# Altium PCB Lab1_Konovalov_USB_RS485.PcbDoc
Units mm, origin at the board's own origin, x right, y up, seen from the top; angles counter-clockwise.
Board outline 47.5 x 32.5 mm, 4 copper layers (Top Layer, Signal Layer 1, Signal Layer 2, Bottom Layer), stack 1.522 mm thick; 17 components, 16 nets, 91 pads, 187 vias.
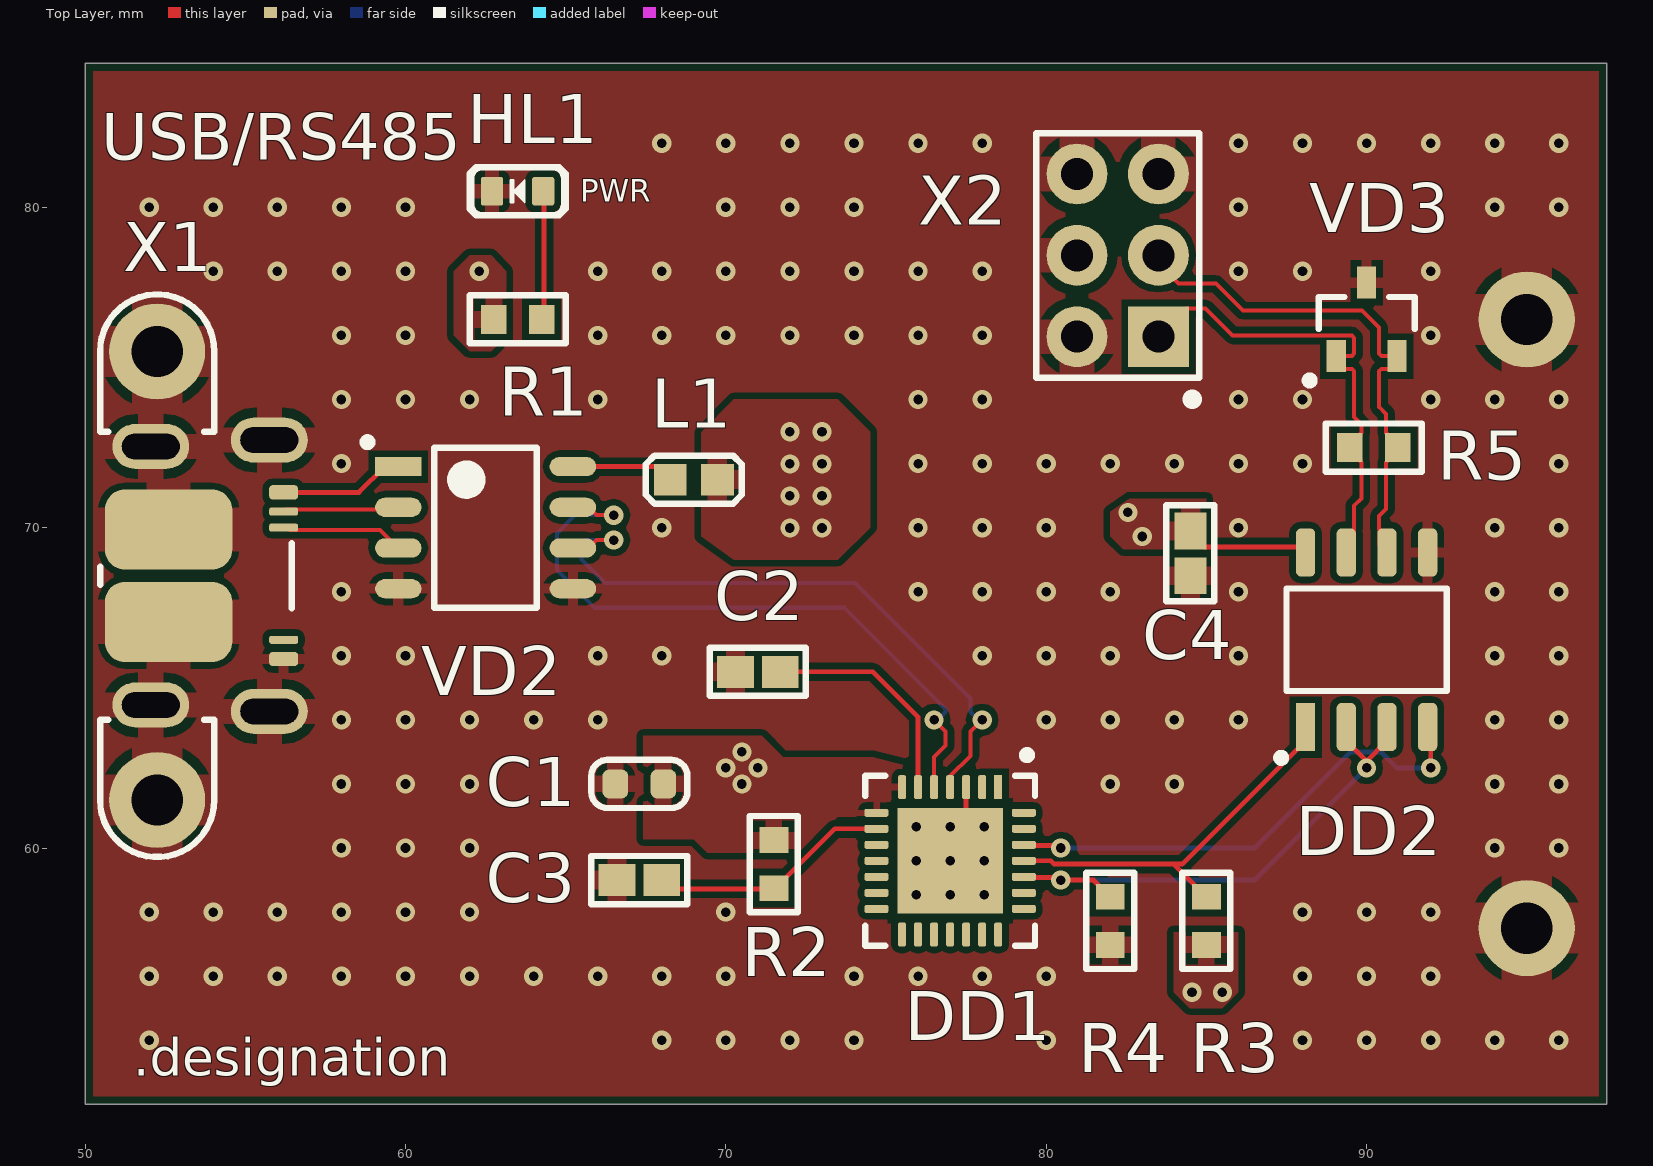
[diagram p0: Top Layer view]
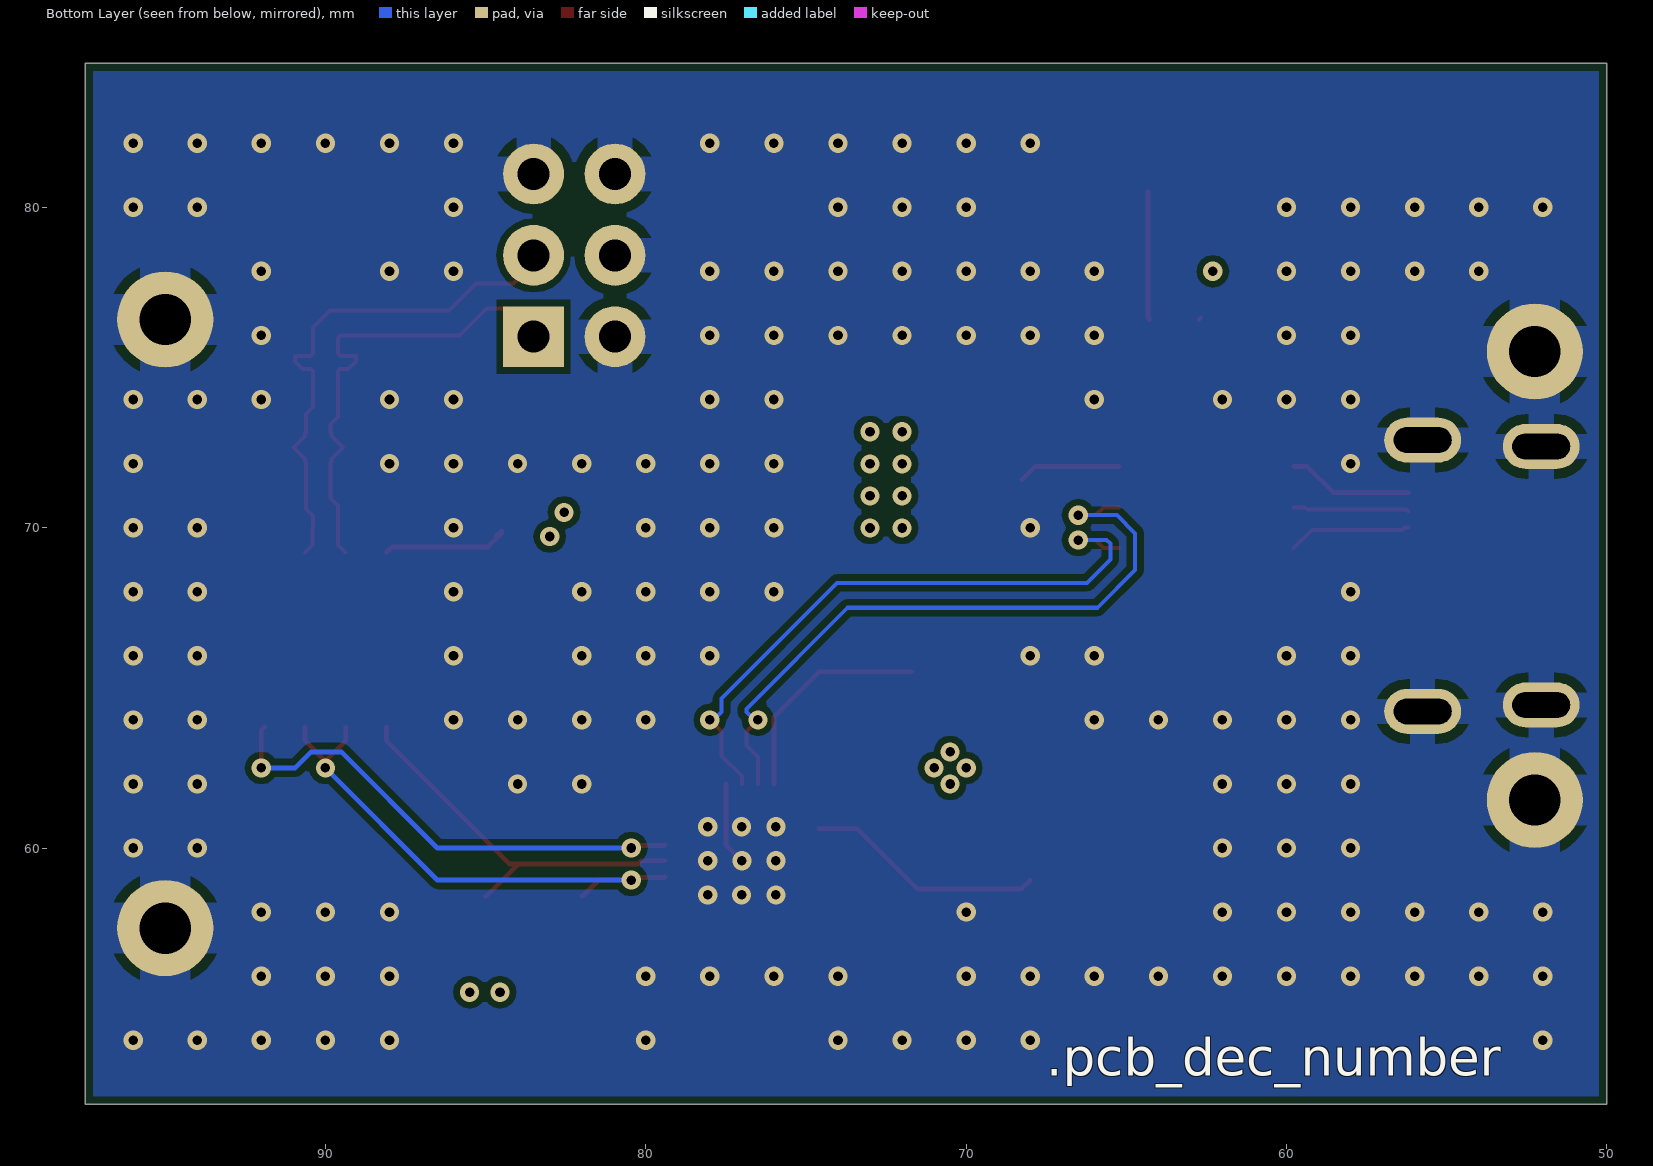
[diagram p1: Bottom Layer view, seen from below]
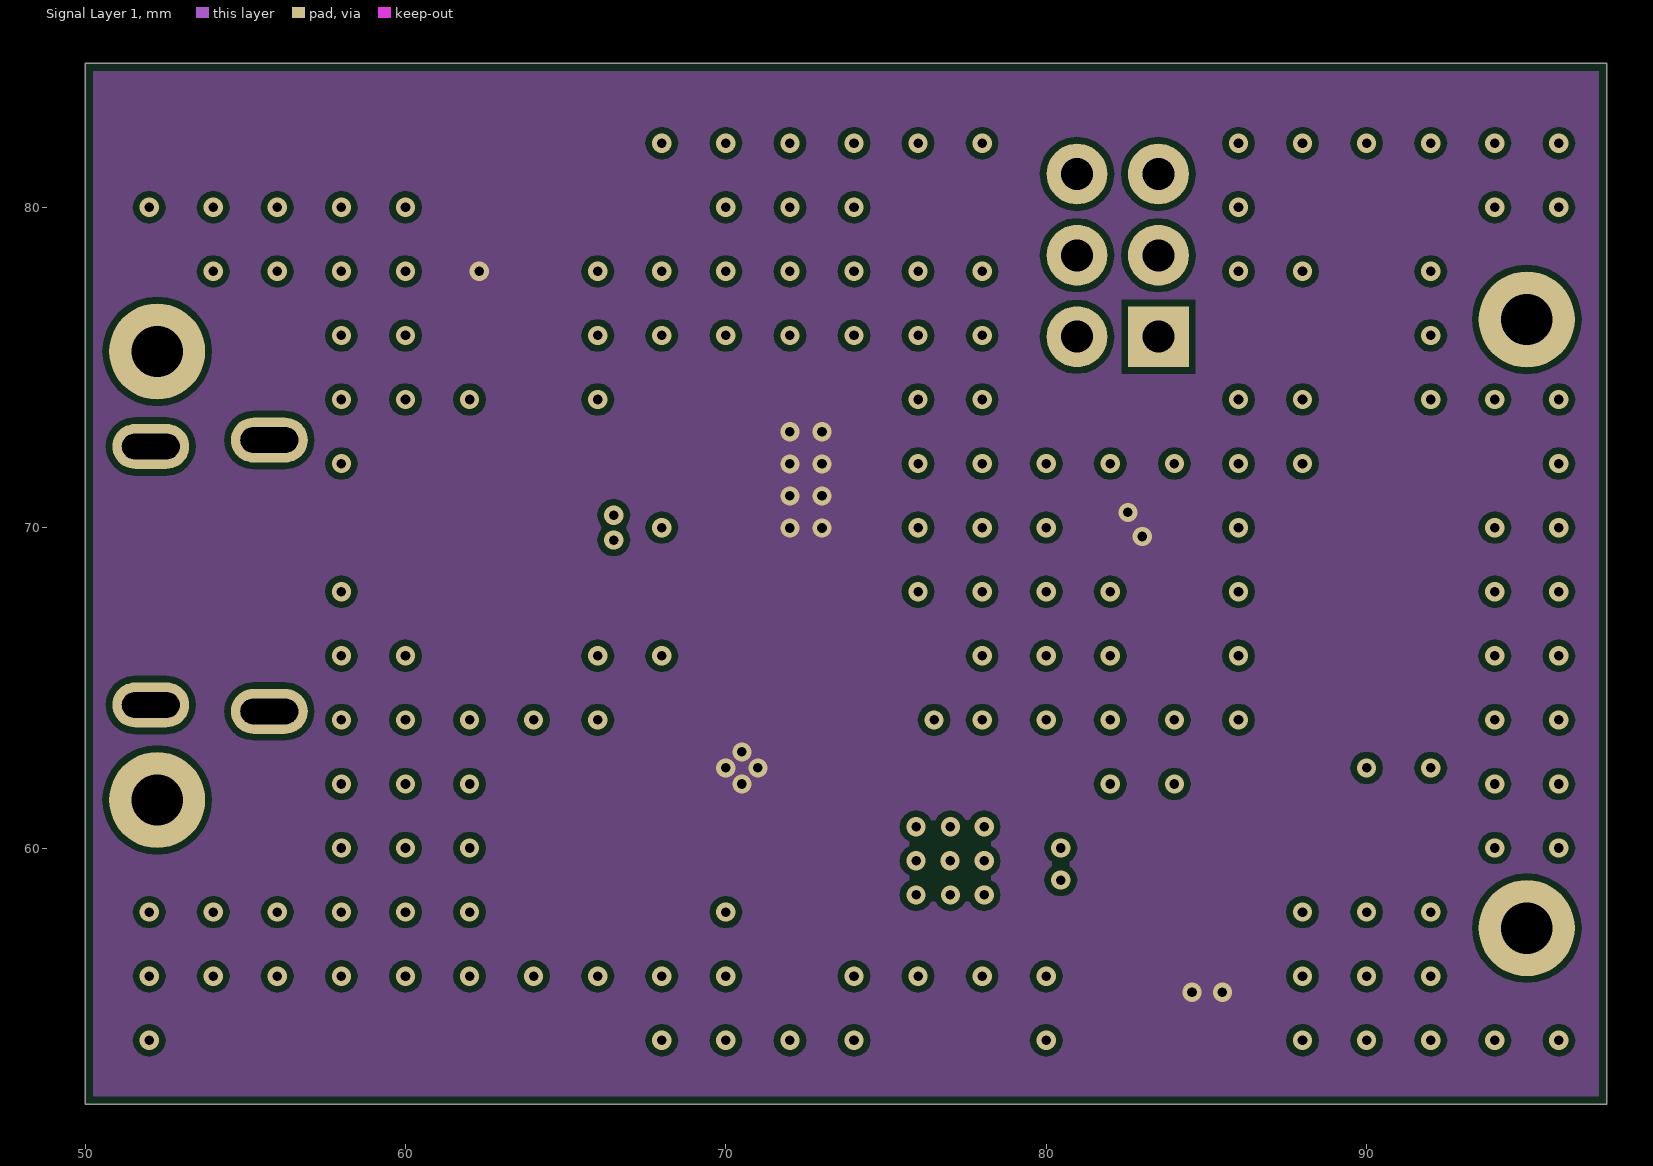
[diagram p2: Signal Layer 1]
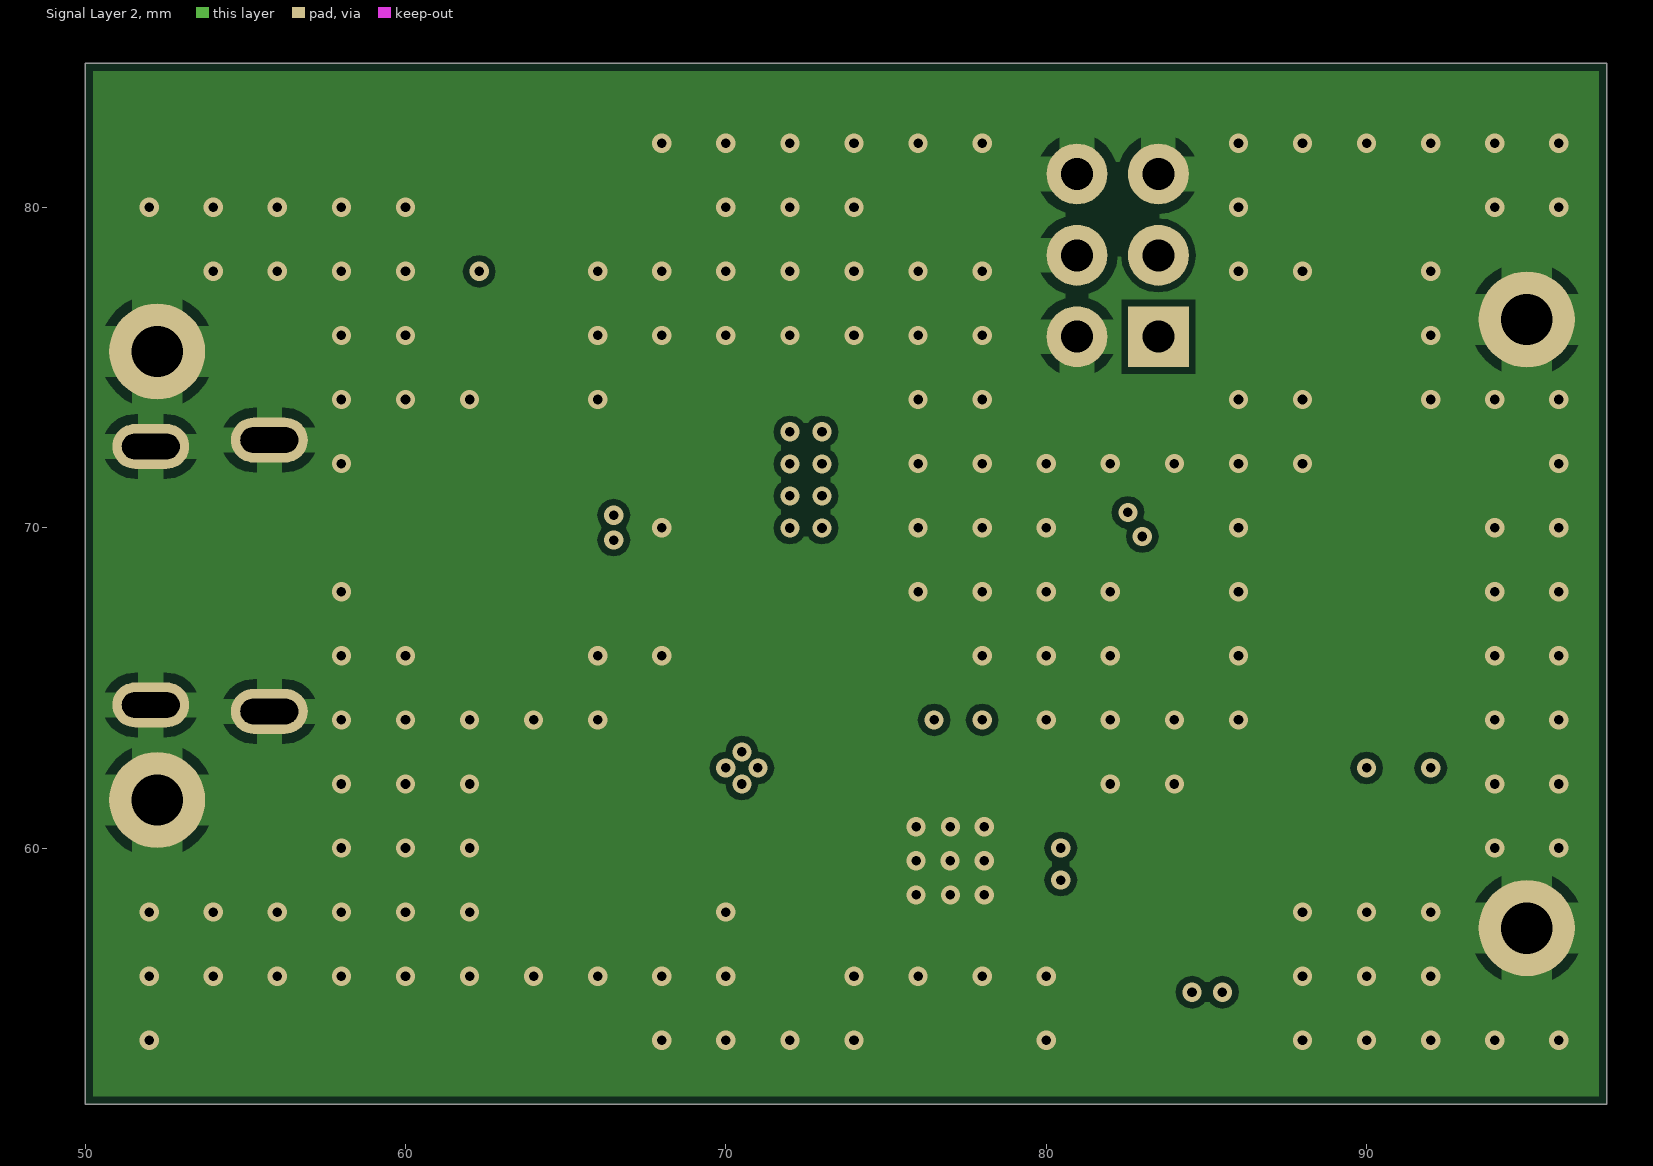
[diagram p3: Signal Layer 2]

## Layer stack, top to bottom
Top Solder: solder mask 0.0102, Solder Resist, Dk 3.5
Top Layer: signal copper 0.018
Prepreg 1: prepreg 0.125, FR4 HiTg170, Dk 5.07
Signal Layer 1: signal copper 0.018
Core 1: core 1.2, FR4, Dk 4.6
Signal Layer 2: signal copper 0.018
Prepreg 2: prepreg 0.125, FR4 HiTg170, Dk 5.07
Bottom Layer: signal copper 0.018
Bottom Solder: solder mask 0.0102, Solder Resist, Dk 3.5

## Board outline
50,52 50,84.5 97.5,84.5 97.5,52

## Design rules (kind name [scope] priority, off if disabled: settings)
AcuteAngle min_acute_angle [OnCopper] p1: minimum=3.50000000000000E+0001 checktracksonly=FALSE // Минимальный угол между примитивами топологии
BoardOutlineClearance board_outline_clearance_std [NOT (OnLayer('Bottom Overlay') OR OnLayer('Top Overlay'))] p1: gap=0.25 ignorepadtopadclearanceinfootprint=FALSE except(0: Arc-SplitContinuation Track-SplitContinuation SMDPad-SplitContinuation THPad-SplitContinuation Via-SplitContinuation Fill-SplitContinuation Poly-SplitContinuation Region-SplitContinuation Text-SplitContinuation) // Отступ элементов топологии от края фрезеруемой печатной платы
Clearance "Stitching GND" [IsStitchingVia and InNet('GND') vs (IsVia and (Not IsStitchingVia)) Or IsPad] p1: gap=0.127 ignorepadtopadclearanceinfootprint=FALSE
Clearance clearance_outer_18um_std [OnTopLayer OR OnBottomLayer] p2: gap=0.125 ignorepadtopadclearanceinfootprint=TRUE except(0.2: Arc-Fill Arc-Poly Track-Fill Track-Poly SMDPad-SMDPad SMDPad-Fill SMDPad-Poly THPad-Fill THPad-Poly Via-Fill Via-Poly Fill-Fill Fill-Poly Poly-Poly Poly-Region Poly-Text; 0.25: Arc-Hole Track-Hole SMDPad-Hole THPad-Hole Via-Hole Fill-Hole Poly-Hole Region-Hole Text-Hole) // Зазоры на внешних слоях
Clearance clearance_inner_18um_std [NOT (OnTopLayer Or OnBottomLayer)] p3: gap=0.125 ignorepadtopadclearanceinfootprint=FALSE except(0.2: Arc-Fill Arc-Poly Track-Fill Track-Poly SMDPad-SMDPad SMDPad-Fill SMDPad-Poly THPad-Fill THPad-Poly Via-Fill Via-Poly Fill-Fill Fill-Poly Poly-Poly Poly-Region Poly-Text; 0.25: Arc-Hole Track-Hole SMDPad-Hole THPad-Hole Via-Hole Fill-Hole Poly-Hole Region-Hole Text-Hole) // Зазоры на внутренних слоях
ComponentClearance [All] p1: gap=0 collisioncheckmode=3 verticalgap=0 showdistances=FALSE
DiffPairsRouting "Schematic Differential Pairs Routing_5" [InNet('RS485_P')] p1: maxlimit=0.65 minlimit=0.254 mostfreqgap=0.65 toplayer_mingap=0.65 toplayer_minwidth=0.125 toplayer_maxwidth=0.125 toplayer_prefwidth=0.125 bottomlayer_mingap=0.65 bottomlayer_minwidth=0.125 bottomlayer_maxwidth=0.125 bottomlayer_prefwidth=0.125 impedanceprofiledriven=TRUE impedanceprofileid={A63519B1-61F6-4221-AEF2-28902BD0E68D} impedanceprofilevalue=120.000000 maxuncoupledlength=12.7
DiffPairsRouting "Schematic Differential Pairs Routing_4" [InNet('D_IN_P')] p2: maxlimit=0.65 minlimit=0.254 mostfreqgap=0.65 toplayer_mingap=0.65 toplayer_minwidth=0.125 toplayer_maxwidth=0.125 toplayer_prefwidth=0.125 bottomlayer_mingap=0.65 bottomlayer_minwidth=0.125 bottomlayer_maxwidth=0.125 bottomlayer_prefwidth=0.125 impedanceprofiledriven=TRUE impedanceprofileid={A63519B1-61F6-4221-AEF2-28902BD0E68D} impedanceprofilevalue=120.000000 maxuncoupledlength=12.7
DiffPairsRouting "Schematic Differential Pairs Routing_3" [InNet('D_IN_N')] p3: maxlimit=0.65 minlimit=0.254 mostfreqgap=0.65 toplayer_mingap=0.65 toplayer_minwidth=0.125 toplayer_maxwidth=0.125 toplayer_prefwidth=0.125 bottomlayer_mingap=0.65 bottomlayer_minwidth=0.125 bottomlayer_maxwidth=0.125 bottomlayer_prefwidth=0.125 impedanceprofiledriven=TRUE impedanceprofileid={A63519B1-61F6-4221-AEF2-28902BD0E68D} impedanceprofilevalue=120.000000 maxuncoupledlength=12.7
DiffPairsRouting "Schematic Differential Pairs Routing_2" [InNet('USB_D_IN_N')] p4: maxlimit=0.65 minlimit=0.254 mostfreqgap=0.65 toplayer_mingap=0.65 toplayer_minwidth=0.125 toplayer_maxwidth=0.125 toplayer_prefwidth=0.125 bottomlayer_mingap=0.65 bottomlayer_minwidth=0.125 bottomlayer_maxwidth=0.125 bottomlayer_prefwidth=0.125 impedanceprofiledriven=TRUE impedanceprofileid={A63519B1-61F6-4221-AEF2-28902BD0E68D} impedanceprofilevalue=120.000000 maxuncoupledlength=12.7
DiffPairsRouting "Schematic Differential Pairs Routing_1" [InNet('USB_D_IN_P')] p5: maxlimit=0.65 minlimit=0.254 mostfreqgap=0.65 toplayer_mingap=0.65 toplayer_minwidth=0.125 toplayer_maxwidth=0.125 toplayer_prefwidth=0.125 bottomlayer_mingap=0.65 bottomlayer_minwidth=0.125 bottomlayer_maxwidth=0.125 bottomlayer_prefwidth=0.125 impedanceprofiledriven=TRUE impedanceprofileid={A63519B1-61F6-4221-AEF2-28902BD0E68D} impedanceprofilevalue=120.000000 maxuncoupledlength=12.7
DiffPairsRouting "Schematic Differential Pairs Routing" [InNet('RS485_N')] p6: maxlimit=0.65 minlimit=0.254 mostfreqgap=0.65 toplayer_mingap=0.65 toplayer_minwidth=0.125 toplayer_maxwidth=0.125 toplayer_prefwidth=0.125 bottomlayer_mingap=0.65 bottomlayer_minwidth=0.125 bottomlayer_maxwidth=0.125 bottomlayer_prefwidth=0.125 impedanceprofiledriven=TRUE impedanceprofileid={A63519B1-61F6-4221-AEF2-28902BD0E68D} impedanceprofilevalue=120.000000 maxuncoupledlength=12.7
DiffPairsRouting diff_pairs_routing [All] p7: maxlimit=0.254 minlimit=0.127 mostfreqgap=0.254 toplayer_maxgap=0.127 toplayer_prefgap=0.127 toplayer_minwidth=0.143 toplayer_maxwidth=0.143 toplayer_prefwidth=0.143 midlayer1_minwidth=0.381 midlayer1_maxwidth=0.381 midlayer1_prefwidth=0.381 midlayer2_minwidth=0.381 midlayer2_maxwidth=0.381 midlayer2_prefwidth=0.381 bottomlayer_maxgap=0.127 bottomlayer_prefgap=0.127 bottomlayer_minwidth=0.143 bottomlayer_maxwidth=0.143 bottomlayer_prefwidth=0.143 impedanceprofiledriven=TRUE impedanceprofileid={FD46899E-B5A2-4EF5-A302-5D2DB6A51F35} maxuncoupledlength=12.7 // Правила трассировки дифференциальных пар
HoleSize min_hole_size_std [IsPad] p1: absolutevalues=TRUE maxlimit=5.9 minlimit=0.6 maxpercent=80.000 minpercent=20.000 // Диаметр межслойного переходного отверстия
HoleSize min_hole_size_via_std [IsVia] p2: absolutevalues=TRUE maxlimit=5.9 minlimit=0.3 maxpercent=80.000 minpercent=20.000 // Минимальный диаметр монтажного отверстия
HoleToHoleClearance hole_to_hole_clearance_std [All] p1: gap=0.2 allowstackedmicrovias=FALSE // Минимальное расстояние между краями двух отверстий
MinimumAnnularRing min_via_ar_std [All] p1: minimumring=0.15 // Поясок площадки переходного отверстия (Annular ring VIA)
MinimumAnnularRing min_pad_ar_std [All] p2: minimumring=0.2 // Поясок монтажной контактной площадки (Annular ring PAD)
MinimumSolderMaskSliver min_solder_mask_bridge_std [All] p1: minsoldermaskwidth=0.15 // Мнимальная ширина масочного мостика
PlaneClearance plane_clearance_18um_std [All] p1: clearance=0.2 // Отступ полигона (для слоя plane) от элементов топологии
PlaneConnect [All] p1: planeconnectstyle=Relief reliefexpansion=0.5 reliefentries=4 reliefconductorwidth=0.2 reliefairgap=0.2
PolygonConnect poly_connect_to_pad<=0.3 [(AsMM(PadXSize_AllLayers)<=0.301) or (AsMM(PadYSize_AllLayers)<=0.301)] p1: thpad.connectstyle=Relief thpad.reliefconductorwidth=0.2 thpad.reliefentries=4 thpad.polygonreliefangle="90 Angle" thpad.airgapwidth=0.2 smdpad.connectstyle=Relief smdpad.reliefconductorwidth=0.2 smdpad.reliefentries=4 smdpad.polygonreliefangle="90 Angle" smdpad.airgapwidth=0.2 via.connectstyle=Direct via.reliefconductorwidth=0.254 via.reliefentries=4 via.polygonreliefangle="90 Angle" via.airgapwidth=0.254 // Правила подключения полигонов для падов от 0,3мм и меньше
PolygonConnect poly_connect_to_pad<=0.4 [(AsMM(PadXSize_AllLayers)<=0.401) or (AsMM(PadYSize_AllLayers)<=0.401)] p2: thpad.connectstyle=Relief thpad.reliefconductorwidth=0.26 thpad.reliefentries=4 thpad.polygonreliefangle="90 Angle" thpad.airgapwidth=0.2 smdpad.connectstyle=Relief smdpad.reliefconductorwidth=0.26 smdpad.reliefentries=4 smdpad.polygonreliefangle="90 Angle" smdpad.airgapwidth=0.2 via.connectstyle=Direct via.reliefconductorwidth=0.254 via.reliefentries=4 via.polygonreliefangle="90 Angle" via.airgapwidth=0.254 // Правила подключения полигонов для падов от 0,4 и меньше
PolygonConnect poly_connect_to_pad<=0.6 [(AsMM(PadXSize_AllLayers)<=0.601) or (AsMM(PadYSize_AllLayers)<=0.601)] p3: thpad.connectstyle=Relief thpad.reliefconductorwidth=0.33 thpad.reliefentries=4 thpad.polygonreliefangle="90 Angle" thpad.airgapwidth=0.2 smdpad.connectstyle=Relief smdpad.reliefconductorwidth=0.33 smdpad.reliefentries=4 smdpad.polygonreliefangle="90 Angle" smdpad.airgapwidth=0.2 via.connectstyle=Direct via.reliefconductorwidth=0.254 via.reliefentries=4 via.polygonreliefangle="90 Angle" via.airgapwidth=0.254 // Правила подключения полигонов для падов от 0,6мм и меньше
PolygonConnect poly_connect_to_pad<=0.7 [(AsMM(PadXSize_AllLayers)<=0.701) or (AsMM(PadYSize_AllLayers)<=0.701)] p4: thpad.connectstyle=Relief thpad.reliefconductorwidth=0.46 thpad.reliefentries=4 thpad.polygonreliefangle="90 Angle" thpad.airgapwidth=0.2 smdpad.connectstyle=Relief smdpad.reliefconductorwidth=0.46 smdpad.reliefentries=4 smdpad.polygonreliefangle="90 Angle" smdpad.airgapwidth=0.2 via.connectstyle=Direct via.reliefconductorwidth=0.254 via.reliefentries=4 via.polygonreliefangle="90 Angle" via.airgapwidth=0.254 // Правила подключения полигонов для падов от 0,7мм и меньше
PolygonConnect poly_connect_to_pad<=0.8 [(AsMM(PadXSize_AllLayers)<=0.8)or(AsMM(PadYSize_AllLayers)<=0.8)] p5: thpad.connectstyle=Relief thpad.reliefconductorwidth=0.53 thpad.reliefentries=4 thpad.polygonreliefangle="90 Angle" thpad.airgapwidth=0.3 smdpad.connectstyle=Relief smdpad.reliefconductorwidth=0.53 smdpad.reliefentries=4 smdpad.polygonreliefangle="90 Angle" smdpad.airgapwidth=0.2 via.connectstyle=Direct via.reliefconductorwidth=0.254 via.reliefentries=4 via.polygonreliefangle="90 Angle" via.airgapwidth=0.254 // Правила подключения полигонов для падов от 0,8мм и меньше
PolygonConnect poly_connect_to_pad<=1 [(AsMM(PadXSize_AllLayers)<=1.01)or(AsMM(PadYSize_AllLayers)<=1.01)] p6: thpad.connectstyle=Relief thpad.reliefconductorwidth=0.6 thpad.reliefentries=4 thpad.polygonreliefangle="90 Angle" thpad.airgapwidth=0.3 smdpad.connectstyle=Relief smdpad.reliefconductorwidth=0.6 smdpad.reliefentries=4 smdpad.polygonreliefangle="90 Angle" smdpad.airgapwidth=0.2 via.connectstyle=Direct via.reliefconductorwidth=0.254 via.reliefentries=4 via.polygonreliefangle="90 Angle" via.airgapwidth=0.254 // Правила подключения полигонов для падов от 1мм и меньше
PolygonConnect poly_connect_to_pad<=1.3 [(AsMM(PadXSize_AllLayers)<=1.31)or(AsMM(PadYSize_AllLayers)<=1.31)] p7: thpad.connectstyle=Relief thpad.reliefconductorwidth=0.66 thpad.reliefentries=4 thpad.polygonreliefangle="90 Angle" thpad.airgapwidth=0.3 smdpad.connectstyle=Relief smdpad.reliefconductorwidth=0.86 smdpad.reliefentries=4 smdpad.polygonreliefangle="90 Angle" smdpad.airgapwidth=0.2 via.connectstyle=Direct via.reliefconductorwidth=0.254 via.reliefentries=4 via.polygonreliefangle="90 Angle" via.airgapwidth=0.254 // Правила подключения полигонов для падов от 1,3мм и меньше
PolygonConnect poly_connect_to_pad<=1.6 [(AsMM(PadXSize_AllLayers)<=1.61)or(AsMM(PadYSize_AllLayers)<=1.61)] p8: thpad.connectstyle=Relief thpad.reliefconductorwidth=0.8 thpad.reliefentries=4 thpad.polygonreliefangle="90 Angle" thpad.airgapwidth=0.3 smdpad.connectstyle=Relief smdpad.reliefconductorwidth=1 smdpad.reliefentries=4 smdpad.polygonreliefangle="90 Angle" smdpad.airgapwidth=0.2 via.connectstyle=Direct via.reliefconductorwidth=0.254 via.reliefentries=4 via.polygonreliefangle="90 Angle" via.airgapwidth=0.254 // Правила подключения полигонов для падов от 1,6мм и меньше
PolygonConnect poly_connect_to_pad<=1.8 [(AsMM(PadXSize_AllLayers)<=1.8)or(AsMM(PadYSize_AllLayers)<=1.8)] p9: thpad.connectstyle=Relief thpad.reliefconductorwidth=1 thpad.reliefentries=4 thpad.polygonreliefangle="90 Angle" thpad.airgapwidth=0.3 smdpad.connectstyle=Relief smdpad.reliefconductorwidth=1.2 smdpad.reliefentries=4 smdpad.polygonreliefangle="90 Angle" smdpad.airgapwidth=0.2 via.connectstyle=Direct via.reliefconductorwidth=0.254 via.reliefentries=4 via.polygonreliefangle="90 Angle" via.airgapwidth=0.254 // Правила подключения полигонов для падов от 1,8мм и меньше
PolygonConnect poly_connect_to_pad<=2 [(AsMM(PadXSize_AllLayers)<=2.01)or(AsMM(PadYSize_AllLayers)<=2.01)] p10: thpad.connectstyle=Relief thpad.reliefconductorwidth=1.1 thpad.reliefentries=4 thpad.polygonreliefangle="90 Angle" thpad.airgapwidth=0.3 smdpad.connectstyle=Relief smdpad.reliefconductorwidth=1.4 smdpad.reliefentries=4 smdpad.polygonreliefangle="90 Angle" smdpad.airgapwidth=0.2 via.connectstyle=Direct via.reliefconductorwidth=0.254 via.reliefentries=4 via.polygonreliefangle="90 Angle" via.airgapwidth=0.254 // Правила подключения полигонов для падов от 2мм и меньше
PolygonConnect poly_connect_to_pad<=2.3 [(AsMM(PadXSize_AllLayers)<=2.31)or(AsMM(PadYSize_AllLayers)<=2.31)] p11: thpad.connectstyle=Relief thpad.reliefconductorwidth=1.2 thpad.reliefentries=4 thpad.polygonreliefangle="90 Angle" thpad.airgapwidth=0.3 smdpad.connectstyle=Relief smdpad.reliefconductorwidth=1.4 smdpad.reliefentries=4 smdpad.polygonreliefangle="90 Angle" smdpad.airgapwidth=0.2 via.connectstyle=Direct via.reliefconductorwidth=0.254 via.reliefentries=4 via.polygonreliefangle="90 Angle" via.airgapwidth=0.254 // Правила подключения полигонов для падов от 2,3мм и меньше
PolygonConnect poly_connect_to_pad<=2.5 [(AsMM(PadXSize_AllLayers)<=2.51)or(AsMM(PadYSize_AllLayers)<=2.51)] p12: thpad.connectstyle=Relief thpad.reliefconductorwidth=1.2 thpad.reliefentries=4 thpad.polygonreliefangle="90 Angle" thpad.airgapwidth=0.3 smdpad.connectstyle=Relief smdpad.reliefconductorwidth=1.4 smdpad.reliefentries=4 smdpad.polygonreliefangle="90 Angle" smdpad.airgapwidth=0.2 via.connectstyle=Direct via.reliefconductorwidth=0.254 via.reliefentries=4 via.polygonreliefangle="90 Angle" via.airgapwidth=0.254 // Правила подключения полигонов для падов от 2,5мм и меньше
PolygonConnect poly_connect_to_pad<=2.7 [(AsMM(PadXSize_AllLayers)<=2.71)or(AsMM(PadYSize_AllLayers)<=2.71)] p13: thpad.connectstyle=Relief thpad.reliefconductorwidth=1.4 thpad.reliefentries=4 thpad.polygonreliefangle="90 Angle" thpad.airgapwidth=0.3 smdpad.connectstyle=Relief smdpad.reliefconductorwidth=1.6 smdpad.reliefentries=4 smdpad.polygonreliefangle="90 Angle" smdpad.airgapwidth=0.2 via.connectstyle=Direct via.reliefconductorwidth=0.254 via.reliefentries=4 via.polygonreliefangle="90 Angle" via.airgapwidth=0.254 // Правила подключения полигонов для падов от 2,7мм и меньше
PolygonConnect poly_connect_to_pad<=3 [(AsMM(PadXSize_AllLayers)<=3.01)or(AsMM(PadYSize_AllLayers)<=3.01)] p14: thpad.connectstyle=Relief thpad.reliefconductorwidth=1.6 thpad.reliefentries=4 thpad.polygonreliefangle="90 Angle" thpad.airgapwidth=0.3 smdpad.connectstyle=Relief smdpad.reliefconductorwidth=1.8 smdpad.reliefentries=4 smdpad.polygonreliefangle="90 Angle" smdpad.airgapwidth=0.2 via.connectstyle=Direct via.reliefconductorwidth=0.254 via.reliefentries=4 via.polygonreliefangle="90 Angle" via.airgapwidth=0.254 // Правила подключения полигонов для падов от 3мм и меньше
PolygonConnect poly_connect_to_pad<=7 [(AsMM(PadXSize_AllLayers)<7.01)or(AsMM(PadYSize_AllLayers)<=7.01)] p15: thpad.connectstyle=Relief thpad.reliefconductorwidth=2 thpad.reliefentries=4 thpad.polygonreliefangle="90 Angle" thpad.airgapwidth=0.4 smdpad.connectstyle=Relief smdpad.reliefconductorwidth=2 smdpad.reliefentries=4 smdpad.polygonreliefangle="90 Angle" smdpad.airgapwidth=0.3 via.connectstyle=Direct via.reliefconductorwidth=0.254 via.reliefentries=4 via.polygonreliefangle="90 Angle" via.airgapwidth=0.254 // Правила подключения полигонов для падов от 7мм и меньше
PolygonConnect poly_connect_to_pad [All] p16: thpad.connectstyle=Relief thpad.reliefconductorwidth=0.25 thpad.reliefentries=4 thpad.polygonreliefangle="90 Angle" thpad.airgapwidth=0.2 smdpad.connectstyle=Relief smdpad.reliefconductorwidth=0.25 smdpad.reliefentries=4 smdpad.polygonreliefangle="90 Angle" smdpad.airgapwidth=0.2 via.connectstyle=Direct via.reliefconductorwidth=0.25 via.reliefentries=4 via.polygonreliefangle="90 Angle" via.airgapwidth=0.2 // Правила подключения полигонов общие
RoutingCorners [All] p1 off: cornerstyle=45-Degree minsetback=2.5 maxsetback=2.5
RoutingVias [All] p1: holewidth=0.3 width=0.6 viastyle="Through Hole" minholewidth=0.3 minwidth=0.6 maxholewidth=5.9 maxwidth=6.4
SilkToSilkClearance silk_to_silk_clearance_std [All] p1 off: silktosilkclearance=0.15 // Отступ текста шелкографии от других примитивов шелкографии
SilkToSolderMaskClearance silk_to_solder_mask_clearance_std [IsPad] p1 off: minsilkscreentomaskgap=0.15 clearancetoexposedcopper=FALSE // Минимальное расстояние между элементами шелкографии и вскрытой медью
SolderMaskExpansion solder_mask_expansion_std [All] p1: expansion=0.05 // Припуск паяльной масски
UnRoutedNet [All] p1: checkbadconnections=TRUE
Width width_18um_std [All] p1: maxlimit=10 minlimit=0.125 preferedwidth=0.15 checkconnectedcopper=TRUE // Ширина проводников (общая)
19 further rules are at their usual default settings.

## Classes and differential pairs
differential pair class USB_SIGNALS: D_IN RS485 USB_D_IN
differential pair USB_D_IN: +USB_D_IN_P -USB_D_IN_N
differential pair RS485: +RS485_P -RS485_N
differential pair D_IN: +D_IN_P -D_IN_N

## Components (designator, comment, footprint, x,y, rotation, side; value= is the part's Value field where it differs from the comment)
C1 "1 мк" C0603#1 67.3,62 r180 top
C2 "0,1 мк" C0603#2 71,65.5 r180 top
C3 "0,1 мк" C0603#2 67.3,59 r0 top
C4 "0,1 мк" C0603#2 84.5,69.2 r90 top
DD1 "CP2101-GM" QFN-28-500X500X90 77,59.6 r270 top
DD2 "SN65HVD1780D" SOIC-8 90,66.5 r90 top
HL1 "TLMS1000-GS08" HL0603 63.5,80.5 r0 top
L1 "BLM18PG221SN1D" BLM-2-0603 69,71.5 r0 top
R1 "220" R0603 63.5,76.5 r0 top
R2 "4,7 к" R0603 71.5,59.5 r90 top
R3 "10 к" R0603 85,57.725 r270 top
R4 "10 к" R0603 82,57.725 r90 top
R5 "120" R0603 90.225,72.5 r0 top
VD2 "USB6B1" SO-8 62.5,70 r0 top
VD3 "SM712-02HTG" SOT23-3 90,76.5 r90 top
X1 "2108877-1" 2108877-1 52.5,68.5 r90 top
X2 "DS1021-2x3SF11-B" DS1021-2X3SF11-B 82.23,78.5 r90 top

## Footprints (in the part's own frame and the unit in brackets; to place one, negate y for a bottom-side part, rotate by r counter-clockwise, add the part's x,y. Pads: shape width x height; smd on the part's side, far side on the other; paste and mask are expansions set on the pad)
2108877-1 [mm]
  rrect50% 0.45x0.9 smd: 1(2.6,-3.696) 5(-2.6,-3.696)
  rrect50% 0.25x0.9 smd: 2(2,-3.696) 3(1.5,-3.696) 4(-2,-3.696)
  round 3 hole 1.6: TP1(-7,0.25) TP1(7,0.25)
  oval 1.4x2.4 hole 0.8 slot 1.8 at 90 deg mask+0.102: TP1(-4.235,-3.25) TP1(-4.035,0.45) TP1(4.035,0.45) TP1(4.235,-3.25)
  rrect50% 2.5x3.98 smd: TP1(-1.441,-0.104) TP1(1.441,-0.104)
  silkscreen extent -8.78,-3.95 8.78,2.03, body extent -8.9,-3.95 8.9,3.95, height 3.39
BLM-2-0603 [mm] "Chip Inductor, 2-Leads, Body 1,60x0,80mm, IPC Medium Density"
  rect 1.02x0.98 smd: 1(-0.74,0) 2(0.74,0)
  silkscreen extent -1.5,-0.75 1.5,0.75, body extent -0.8,-0.37 0.8,0.38, height 0.8
C0603#1 [mm] "Chip Capacitor, 2-Leads, Body 1,60x0,80mm, IPC Medium Density"
  rrect50% 0.8x0.9 smd: 1(-0.75,0) 2(0.75,0)
  silkscreen extent -1.5,-0.75 1.5,0.75, body extent -0.8,-0.4 0.8,0.4, height 0.8
C0603#2 [mm] "Chip Capacitor, 2-Leads, Body 1,60x0,80mm, IPC Medium Density"
  rect 1.15x1 smd: 1(-0.7,0) 2(0.7,0)
  silkscreen extent -1.5,-0.75 1.5,0.75, body extent -0.8,-0.4 0.8,0.4, height 0.8
DS1021-2X3SF11-B [mm]
  rect 1.9x1.9 hole 1: 1(-2.54,-1.27)
  round 1.9 hole 1: 2(0,-1.27) 4(-2.54,1.27)
  round 1.9 hole 1 mask+0.102: 3(2.54,-1.27) 5(0,1.27) 6(2.54,1.27)
  silkscreen extent -4.5,-2.55 3.81,2.54, body extent -3.81,-2.54 3.81,2.54, height 8.59
HL0603 [mm] "Chip Resistor, 2-Leads, Body 1,60x0,80mm, IPC Medium Density"
  rrect25% 0.7x0.9 smd: 1(-0.8,0) 2(0.8,0)
  silkscreen extent -1.5,-0.75 1.5,0.75, body extent -0.81,-0.4 0.81,0.4, height 0.64
QFN-28-500X500X90 [mm] "QFN, 28-Leads, Body 5,00x5,00mm, Pitch 0,50mm, Thermal Pad 3,20x3,20mm, IPC Medium Density"
  rect 3.3x3.3 smd: 0(0,0)
  rect 0.75x0.25 smd: 1(-2.3,1.5)
  rrect50% 0.75x0.25 smd: 2(-2.3,1) 3(-2.3,0.5) 4(-2.3,0) 5(-2.3,-0.5) 6(-2.3,-1) 7(-2.3,-1.5) 15(2.3,-1.5) 16(2.3,-1) 17(2.3,-0.5) 18(2.3,0) 19(2.3,0.5) 20(2.3,1) 21(2.3,1.5)
  rrect50% 0.25x0.75 smd: 8(-1.5,-2.3) 9(-1,-2.3) 10(-0.5,-2.3) 11(0,-2.3) 12(0.5,-2.3) 13(1,-2.3) 14(1.5,-2.3) 22(1.5,2.3) 23(1,2.3) 24(0.5,2.3) 25(0,2.3) 26(-0.5,2.3) 27(-1,2.3) 28(-1.5,2.3)
  silkscreen extent -3.42,-2.65 2.65,2.65, body extent -2.5,-2.5 2.5,2.5, height 0.9
R0603 [mm] "Chip Resistor, 2-Leads, Body 1,60x0,80mm, IPC Medium Density"
  rect 0.8x0.9 smd: 1(-0.75,0) 2(0.75,0)
  silkscreen extent -1.5,-0.75 1.5,0.75, body extent -0.77,-0.43 0.78,0.43, height 0.43
SO-8 [mm] "SOIC, 8-Leads, Body 4,90x3,90mm, Pitch 1,27mm, IPC Medium Density"
  rect 1.45x0.6 smd: 1(-2.725,1.905)
  oval 1.45x0.6 smd: 2(-2.725,0.635) 3(-2.725,-0.635) 4(-2.725,-1.905) 5(2.725,-1.905) 6(2.725,-0.635) 7(2.725,0.635) 8(2.725,1.905)
  silkscreen extent -3.81,-2.5 1.6,2.79, body extent -3.06,-2.47 3.06,2.48, height 1.75
SOIC-8 [mm] "SOIC, 8-Leads, Body 4,90x3,90mm, Pitch 1,27mm, IPC Medium Density"
  rect 1.5x0.6 smd: 1(-2.725,1.905)
  rrect50% 1.5x0.6 smd: 2(-2.725,0.635) 3(-2.725,-0.635) 4(-2.725,-1.905) 5(2.725,-1.905) 6(2.725,-0.635) 7(2.725,0.635) 8(2.725,1.905)
  silkscreen extent -3.81,-2.5 1.6,2.79, body extent -3.06,-2.47 3.06,2.48, height 1.75
SOT23-3 [mm] "SOT23, 3-Leads, Body 2,92x2,37mm"
  rect 1x0.6 smd: 1(-1.145,0.95) 2(-1.145,-0.95) 3(1.145,0)
  silkscreen extent -2.03,-1.5 0.7,1.9, body extent -1.25,-1.5 1.25,1.5, height 1.1

## Part data
C1: library part c0022, "=Описание", HelpURL=https://www.yageo.com/upload/media/product/products/datasheet/mlcc/UPY-GPHC_X7R_6.3V-to-50V_20.pdf, ID=c0022, Корпус=0603, Наименование=CC0603KRX7R8BB105, Напряжение="25 В", Номинал="1 мк", Номинальное напряжение="25 В", Описание="Конденсатор чип 0603 1 мкФ 25 В ±10 %", Отклонение="±10 %", Производитель="YAGEO Corp.", Рабочие температуры="от -55 °С до +125 °С", Фамилия=Ларионов
C2 C3 C4: library part c0018, "=Описание", HelpURL=https://www.yageo.com/upload/media/product/products/datasheet/mlcc/UPY-GPHC_X7R_6.3V-to-50V_20.pdf, ID=c0018, Корпус=0603, Наименование=CC0603JRX7R9BB104, Напряжение="50 В", Номинал="0,1 мк", Номинальное напряжение="50 В", Описание="Конденсатор чип 0603 0,1 мкФ 50 В ±5 %", Отклонение="±5 %", Производитель="YAGEO Corp.", Рабочие температуры="от -55 °С до +125 °С", Фамилия=Ларионов
DD1: library part dd0002, "=Описание", HelpURL=https://www.silabs.com/interface/usb-bridges/classic/device.cp2101, ID=dd0002, Корпус=QFN-28, Наименование=CP2101-GM, Описание="Преобразователь USB-UART", Производитель="Silicon Laboratories", Фамилия=Коновалов
DD2: library part dd0014, "=Описание", HelpURL=https://www.ti.com/product/SN65HVD1780, ID=dd0014, Корпус=SOIC-8, Наименование=SN65HVD1780D, Описание="Приемопередатчик RS-485", Производитель="Texas Instruments", Фамилия=Коновалов
HL1: library part hl0001, "=Описание", Colour=Красный, HelpURL=https://www.vishay.com/leds/list/product-83172/, ID=hl0001, Корпус=0603, Наименование=TLMS1000-GS08, Номинальная длина волны="628 нм", Номинальная сила света="4 мкд", Номинальное падение напряжения="1,8 В", Номинальный прямой ток="15 мА", Описание="Светодиод чип 0603 красный", Производитель="Vishay Intertechnology, Inc.", Рабочие температуры="от –40 °С до +100 °С", Рассеиваемая мощность="40 мВт", Фамилия=Ларионов, Цвет=Красный
L1: library part l0002, "=Описание", HelpURL=https://www.murata.com/en-global/products/productdetail?partno=BLM18PG221SN1%23, ID=l0002, Корпус=0603, Наименование=BLM18PG221SN1D, Описание="Ферритовая бусина 220 Ом ±25 %", Отклонение, 100 Мгц="±25 %", Производитель="Murata Manufacturing Co., Ltd.", Рабочие температуры="от -55 °С до +125 °С", Сопротивление, 100 МГц="220 Ом", Сопротивление при постоянном токе="0,1 Ом", Фамилия=Самарин
R1: library part r0009, "=Описание", HelpURL=https://www.yageo.com/upload/media/product/productsearch/datasheet/rchip/PYu-RC_Group_51_RoHS_L_11.pdf, ID=r0009, Корпус=0603, Наименование=RC0603FR-07220RL, Номинал=220, Номинальное напряжение="75 В", Номинальный ток="1 А", Описание="Резистор чип 0603 220 Ом ±1 % 0,1 Вт", Отклонение="±1 %", Производитель="YAGEO Corp.", Рабочие температуры="от -55 °С до +155 °С", Фамилия=Ларионов
R2: library part r0029, "=Описание", HelpURL=https://www.yageo.com/upload/media/product/productsearch/datasheet/rchip/PYu-RC_Group_51_RoHS_L_11.pdf, ID=r0029, Корпус=0603, Наименование=RC0603FR-074K7L, Номинал="4,7 к", Номинальное напряжение="75 В", Номинальный ток="1 А", Описание="Резистор чип 0603 4,7 кОм ±1 % 0,1 Вт", Отклонение="±1 %", Производитель="YAGEO Corp.", Рабочие температуры="от -55 °С до +155 °С", Фамилия=Ларионов
R3 R4: library part r0040, "=Описание", HelpURL=https://www.yageo.com/upload/media/product/productsearch/datasheet/rchip/PYu-RC_Group_51_RoHS_L_11.pdf, ID=r0040, Корпус=0603, Наименование=RC0603FR-0710KL, Номинал="10 к", Номинальное напряжение="75 В", Номинальный ток="1 А", Описание="Резистор чип 0603 10 кОм ±1 % 0,1 Вт", Отклонение="±1 %", Производитель="YAGEO Corp.", Рабочие температуры="от -55 °С до +155 °С", Фамилия=Самарин
R5: library part r0008, "=Описание", HelpURL=https://www.yageo.com/upload/media/product/productsearch/datasheet/rchip/PYu-RC_Group_51_RoHS_L_11.pdf, ID=r0008, Корпус=0603, Наименование=RC0603FR??07120RL, Номинал=120, Номинальное напряжение="75 В", Номинальный ток="1 А", Описание="Резистор чип 0603 120 Ом ±1 % 0,1 Вт", Отклонение="±1 %", Производитель="YAGEO Corp.", Рабочие температуры="от -55 °С до +155 °С", Фамилия=Самарин
VD2: library part vd0006, "=Описание", HelpURL=https://www.st.com/content/st_com/en/products/protection-devices/esd-protection/usb-port-protection/usb6b1.html, ID=vd0006, Корпус=SO-8, Наименование=USB6B1, Описание="Диодная сборка для подавления помех, от 6 В", Производитель=STMicroelectronics, Фамилия=Ларионов
VD3: library part vd0003, "=Описание", HelpURL=https://www.littelfuse.com/products/tvs-diode-arrays/general-purpose-esd-protection/sm712.aspx, ID=vd0003, Корпус=SOT23-3, Наименование=SM712-02HTG, Описание="Диодная сборка для подавления помех, -7/12 В", Производитель="Littelfuse, Inc.", Фамилия=Самарин
X1: library part x0001, "=Описание", Contact_1=VBUS, Contact_2=D-, Contact_3=D+, Contact_4=ID, Contact_5=GND, HelpURL=https://www.te.com/global-en/product-2108877-1.html, ID=x0001, Наименование=2108877-1, Описание="Micro USB 2.0 Type B IP68 гнездо", Производитель="TE Connectivity", Фамилия=Ларионов
X2: library part x0015, "=Описание", Contact_1=B, Contact_2=A, Contact_3=GND, Contact_4=GND, Contact_5=GND, Contact_6=GND, HelpURL=http://en.connfly.group/product/xVkr=EusQssAN0gN=Aos=mU+UrVkR9kqEAN0gN9g+WqANB+A, ID=x0015, Наименование=DS1021-2x3SF11-B, Описание="PLS 2x3 pin 2,54 мм вилка прямой", Производитель="Connfly Electronic Co., Ltd.", Фамилия=Самарин

## Free pads (board coordinates)
  round 3 hole 1.6: 2(95,57.5) 3(95,76.5)

## Via types
v1: diameter 0.6, hole 0.3, Top Layer to Bottom Layer, tented both sides, 178 vias
v2: diameter 0.6, hole 0.3, Top Layer to Bottom Layer, 9 vias

## Nets (pads, with @x,y where several pads share a name; then routed paths per layer and width w, separated by ;. In a path a pad name is that pad's centre, name@x,y a point inside that pad or via, vN(x,y) a via of type N, cw(c..) or ccw(c..) an arc to the next point about the centre after c; other vN are vias at no path point)
5V_IN: VD2.1 X1.1 | length 3.9
  Top Layer w0.15: X1.1 58.545,71.1 59.35,71.905 VD2.1
+5V: C1.1 C4.2 DD1.7 DD1.8 DD2.8 L1.2 R1.1 R2.2 R3.2 | length 4.2
  Top Layer w0.15: R1.1@62.675,76.55 R1.1@62.725,76.5 ; C4.2@84.675,69.725 C4.2 84.5,69.825 84.925,69.4 87.92,69.4 DD2.8
  other v1: 84.55,55.5 85.5,55.5 70.5,62 70,62.5 71,62.5 70.5,63 83,69.725 72,69.99 73,69.99 82.55,70.475 72,70.99 73,70.99 72,71.99 73,71.99 72,72.99 73,72.99 62.3,78
D: DD1.26 DD2.4 | length 15.4
  Top Layer w0.15: DD1.26@79.4,60.1 79.419,60.081 80.373,60.081 v1(80.454,60) ; DD2.4 92,63.68 v1(92,62.5)
  Bottom Layer w0.15: v1(80.454,60) 86.5,60 89.5,63 90.439,63 90.939,62.5 v1(92,62.5)
D_IN_N: DD1.5 VD2.7 | length 21.3
  Top Layer w0.125: VD2.7 65.713,70.635 65.961,70.388 v1(66.5,70.388) ; DD1.5@76.5,62 76.5,62.838 76.862,63.201 76.862,63.638 v1(76.5,64)
  Bottom Layer w0.125: v1(66.5,70.388) 65.291,70.388 64.725,69.821 64.725,68.679 65.904,67.5 73.707,67.5 76.862,64.344 76.862,64.241 76.622,64 v1(76.5,64)
D_IN_P: DD1.4 VD2.6 | length 20.2
  Top Layer w0.125: VD2.6 65.713,69.365 65.961,69.612 v1(66.5,69.612) ; DD1.4@77,62 77,62.242 77.638,62.88 77.638,63.638 v1(78,64)
  Bottom Layer w0.125: v1(66.5,69.612) 65.612,69.612 65.5,69.5 65.5,69 66.225,68.275 74.028,68.275 77.638,64.666 77.638,64.241 77.878,64 v1(78,64)
GND: C1.2 C2.2 C3.1 C4.1 DD1.0 DD1.3 DD2.5 HL1.1 pad.2 pad.3 R4.1 VD2.4 VD2.5 VD3.3 X1.5 X1.TP1 X2.3 X2.4 X2.5 X2.6 | length 2.6
  Top Layer w0.15: v2(77,59.6) 77.5,60.1 DD1.3@77.5,62
  other v1: 52,54 68,54 70,54 72,54 74,54 80,54 88,54 90,54 92,54 94,54 96,54 52,56 54,56 56,56 58,56 60,56 62,56 64,56 66,56 68,56 70,56 74,56 76,56 78,56 80,56 88,56 90,56 92,56 52,58 54,58 56,58 58,58 60,58 62,58 70,58 88,58 90,58 92,58 58,60 60,60 62,60 94,60 96,60 58,62 60,62 62,62 82,62 84,62 94,62 96,62 58,64 60,64 62,64 64,64 66,64 80,64 82,64 84,64 86,64 94,64 96,64 58,66 60,66 66,66 68,66 78,66 80,66 82,66 86,66 94,66 96,66 58,68 76,68 78,68 80,68 82,68 86,68 94,68 96,68 68,70 76,70 78,70 80,70 86,70 94,70 96,70 58,72 76,72 78,72 80,72 82,72 84,72 86,72 88,72 96,72 58,74 60,74 62,74 66,74 76,74 78,74 86,74 88,74 92,74 94,74 96,74 58,76 60,76 66,76 68,76 70,76 72,76 74,76 76,76 78,76 92,76 54,78 56,78 58,78 60,78 66,78 68,78 70,78 72,78 74,78 76,78 78,78 86,78 88,78 92,78 52,80 54,80 56,80 58,80 60,80 70,80 72,80 74,80 86,80 94,80 96,80 68,82 70,82 72,82 74,82 76,82 78,82 86,82 88,82 90,82 92,82 94,82 96,82
  other v2: 75.937,58.537 77.01,58.537 78.063,58.537 75.937,59.6 78.063,59.6 75.937,60.663 77.01,60.663 78.063,60.663
NetC2_1: C2.1 DD1.6 | length 7
  Top Layer w0.15: C2.1 74.588,65.5 76,64.088 DD1.6@76,62
NetHL1_2: HL1.2 R1.2 | length 4
  Top Layer w0.15: R1.2@64.275,76.5 64.325,76.55 HL1.2@64.325,80.5
NetL1_1: L1.1 VD2.8 | length 3.2
  Top Layer w0.15: VD2.8 67.855,71.905 L1.1
R: DD1.25 R3.1 | length 12.2
  Top Layer w0.15: DD1.25@79.4,59.6 80.147,59.6 80.247,59.5 83.975,59.5 ; R3.1@85,58.5 84.975,58.5 83.975,59.5 ; 88.095,63.775 88.095,63.35 84.245,59.5 83.975,59.5
RS485_N: DD2.7 R5.1 VD3.1 X2.1 | length 15.1
  Top Layer w0.125: X2.1 84.382,76.842 84.971,76.842 85.814,76 89.539,76 89.612,75.927 89.612,75.428 89.539,75.355 VD3.1 89.05,75.192 89.287,74.955 89.539,74.955 89.612,74.882 89.612,73.452 89.837,73.227 89.837,72.961 89.812,72.936 89.812,72.862 89.45,72.5 89.812,72.138 89.812,72.064 89.837,72.039 89.837,70.908 89.612,70.683 89.612,69.961 89.602,69.951 89.602,69.462 DD2.7
RS485_P: DD2.6 R5.2 VD3.2 X2.2 | length 16.5
  Top Layer w0.125: X2.2 83.5,78.241 84.123,77.618 85.292,77.618 86.135,76.775 89.86,76.775 90.388,76.248 90.388,75.428 90.461,75.355 VD3.2 90.95,75.192 90.713,74.955 90.461,74.955 90.388,74.882 90.388,73.773 90.613,73.548 90.613,72.961 90.638,72.936 90.638,72.862 91,72.5 90.638,72.138 90.638,72.064 90.613,72.039 90.613,70.587 90.388,70.362 90.388,69.961 90.398,69.951 90.398,69.462 DD2.6
RST: C3.2 DD1.9 R2.1 | length 7.5
  Top Layer w0.15: C3.2 68.275,58.725 71.5,58.725 71.525,58.725 73.4,60.6 DD1.9@74.6,60.6
RTS: DD1.24 DD2.2 DD2.3 R4.2 | length 16.7
  Top Layer w0.15: DD1.24@79.4,59.1 79.419,59.081 80.373,59.081 v1(80.454,59) 81.475,59 81.975,58.5 R4.2@82,58.5 ; DD2.2 89.365,63.35 v1@90,62.715 ; v1(90,62.5) v1@90,62.715 ; DD2.3 90.635,63.35 v1@90,62.715
  Bottom Layer w0.15: v1(80.454,59) 86.5,59 v1(90,62.5)
USB_D_IN_N: VD2.2 X1.2 | length 3.6
  Top Layer w0.125: X1.2 56.258,70.562 59.35,70.562 59.423,70.635 VD2.2
USB_D_IN_P: VD2.3 X1.3 | length 3.8
  Top Layer w0.125: X1.3 56.317,70 56.385,69.932 59.208,69.932 VD2.3
pads on no net: DD1.1 DD1.2 DD1.10 DD1.11 DD1.12 DD1.13 DD1.14 DD1.15 DD1.16 DD1.17 DD1.18 DD1.19 DD1.20 DD1.21 DD1.22 DD1.23 DD1.27 DD1.28 DD2.1 X1.4

## Polygon pours and split planes (outlines as drawn)
GND on Top Layer "GND_L01_P252" (solid, remove dead copper, pour order 252): 50,84.5 50,52 97.5,52 97.5,84.5
+5V on Top Layer "+5V_L01_P236" (solid, remove dead copper, pour order 236): 67.425,60.275 69,60.275 69.425,59.85 72.375,59.85 73.5,60.975 74.6,60.975 75.025,60.975 75.025,61.225 75.412,61.612 75.448,61.575 75.552,61.575 75.625,61.648 75.625,62.583 74.6,62.838 71.787,62.838 71.125,63.5 67.425,63.5
+5V on Top Layer "+5V_L01_P202" (solid, remove dead copper, pour order 202): 83.975,57.375 83.975,55.5 84.475,55 85.5,55 86,55.5 86,57.375
+5V on Top Layer "+5V_L01_P184" (solid, remove dead copper, pour order 184): 63.15,78 62.675,78.5 62,78.5 61.5,78 61.5,76 62,75.5 62.675,75.5 63.15,75.975
+5V on Top Layer "+5V_L01_P200" (solid, remove dead copper, pour order 200): 85,69.325 85,70.908 82.592,70.908 82,70.5 82,69.725 82.4,69.325
+5V on Top Layer "+5V_L01_P176" (solid, remove dead copper, pour order 176): 69.23,72.98 70.25,74 73.5,74 74.5,73 74.5,70 73.5,69 70.25,69 69.23,69.73 69.23,71.01
GND on Bottom Layer "GND_L04_P246" (solid, remove dead copper, pour order 246): 50,84.5 50,52 97.5,52 97.5,84.5
GND on Signal Layer 2 "GND_L03_P248" (solid, remove dead copper, pour order 248): 50,84.5 50,52 97.5,52 97.5,84.5
+5V on Signal Layer 1 "+5V_L02_P250" (solid, remove dead copper, pour order 250): 50,84.5 50,52 97.5,52 97.5,84.5

## Silkscreen, mask and mechanical layers (free items; w line width, h text height)
Top Overlay:
  text "USB/RS485" at 50.5,81 h2.5
  text "PWR" at 65.45,79.935 h1.2
  text ".designation" at 51.5,52.5 h2
Bottom Overlay:
  text ".pcb_dec_number" at 67.5,52.5 h2
Board:
  the board outline again, w0.1
Assembly Notes (Mech5):
  text "'.title'" at 50,49.5 h2
  text "'.project'_'.pcb_dec_number'['.Pcb_File_Name_No_Path']" at 50,45.5 h2